# EAGLE board AgitPOV_WiFi_01 (EAGLE 7.4.0)
REV: A
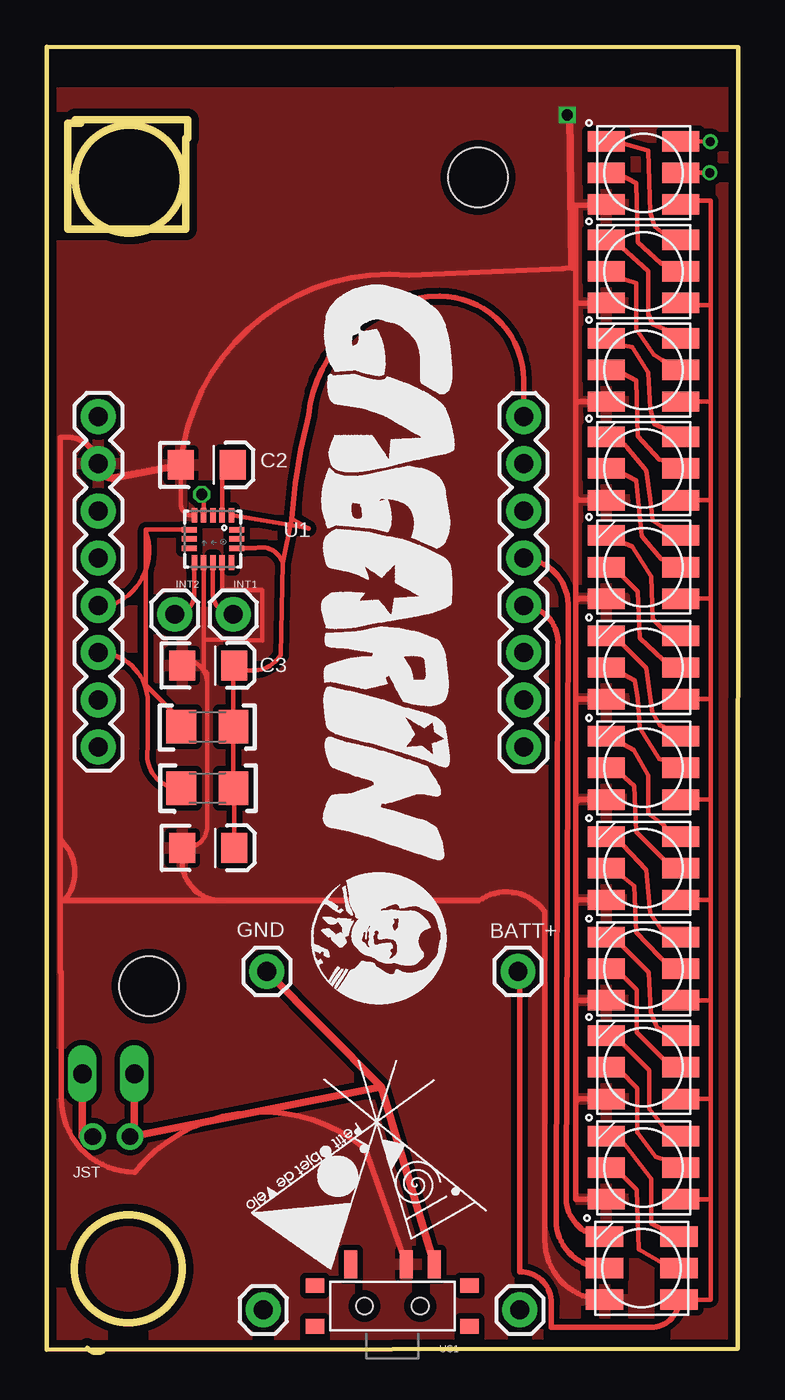
[diagram p0: board, top side]
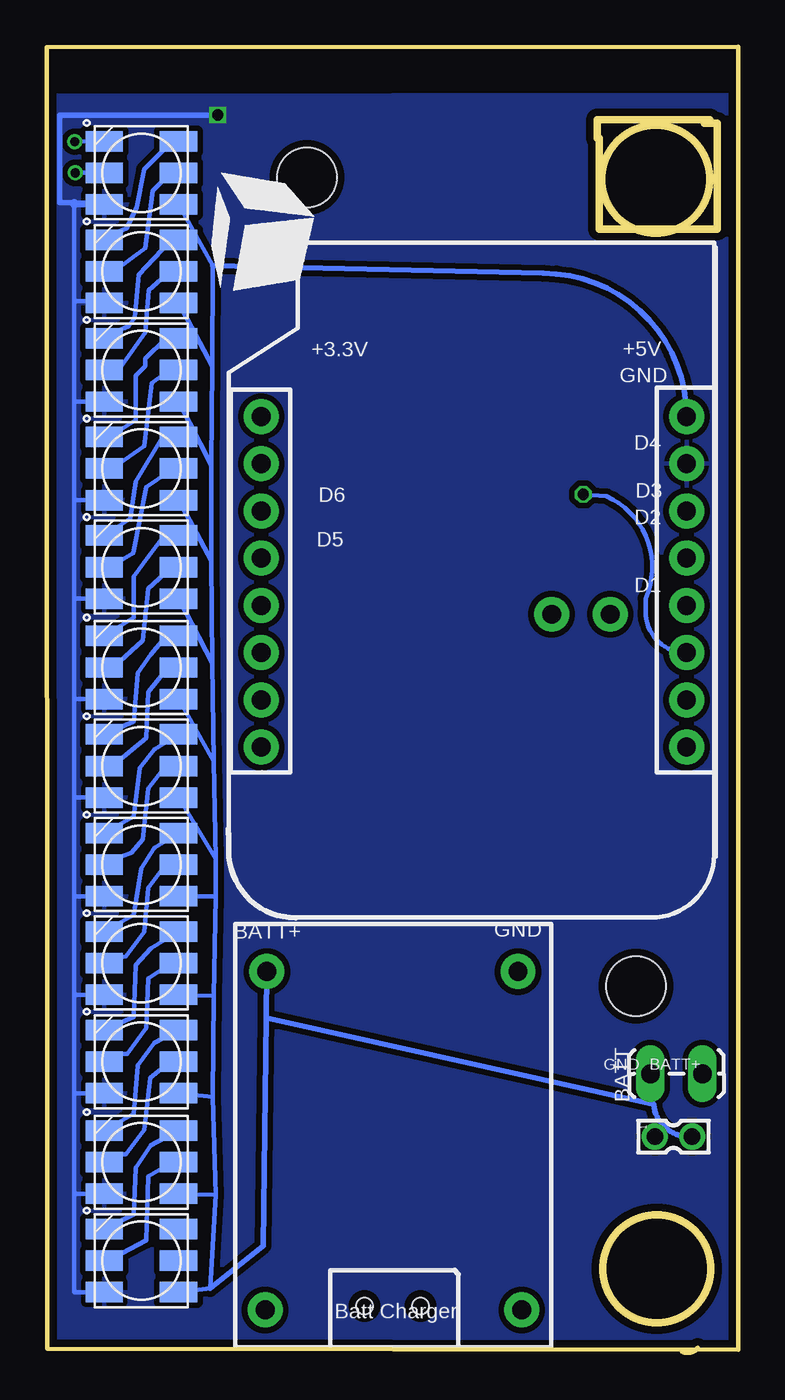
[diagram p1: board, bottom side, seen from below]

Size 37.2 x 70.27 mm. Coordinates in mm from the lower left corner, seen from the top.
Outline: 3.05,0.1 arc-90 2.19,0.29
Outline: 0,0.17 0,70.27 37.2,70.22 37.15,0.22 0,0.17
Outline: circle at 4.45,63.13 radius 2.88
Outline: circle at 4.4,4.53 radius 2.88
Copper layers (1*16): Top 0.035mm / dielectric 1.5mm / Bottom 0.035mm
Design rules "NOA Eagle Rule 2016-06-12": minimum track width 6mil, minimum drill 0.3mm, track to track 6mil, track to pad 6mil, pad to pad 6mil, via to via 6mil, smd to smd 0mil, copper to edge 0.4mm, drill to drill 10mil, minimum pad ring 10mil, minimum via ring 6mil, stop-mask expansion 2mil, vias tented up to drill 25mil, thermal gap 10mil
Holes 3.2 mm at 23.2,63.22 5.51,19.73

## Footprints (pad centres in the part's own frame; a part is rotated, then mirrored left to right if it is on the bottom)
1X02_LOCK_LONGPADS = drill 1.016 long: 1 -0.127,0; 2 2.667,0
1X01 = drill 1.016 pad 1.88: 1 0,0
EIA3216 = smd 1.4 x 1.6: A 1.4,0; C -1.4,0
APA102_5050 = smd 2 x 1.1: 1 2,-1.7; 2 2,0; 3 2,1.7; 4 -2,1.7; 5 -2,0; 6 -2,-1.7
332-02 = drill 0.9 pad 1.27: 1 0,-1; 2 0,1
1206 = smd 1.6 x 1.8: 1 -1.4,0; 2 1.4,0
QFN-16_0.5MM = smd 0.8 x 0.3: 1 -1.275,1; 2 -1.275,0.5; 3 -1.275,0; 4 -1.275,-0.5; 5 -1.275,-1; 9 1.275,-1; 10 1.275,-0.5; 11 1.275,0; 12 1.275,0.5; 13 1.275,1 | smd 0.3 x 0.8: 6 -0.5,-1.275; 7 0,-1.275; 8 0.5,-1.275; 14 0.5,1.275; 15 0,1.275; 16 -0.5,1.275
KPS-1290 = smd 0.7 x 1.5: O -2.25,2.25; P 0.75,2.25; S 2.25,2.25 | smd 1 x 0.8: P$1 -4.15,1.1; P$2 -4.15,-1.1; P$3 4.15,-1.1; P$4 4.15,1.1 | hole 0.9: -1.5,0; 1.5,0
1X08_ROUND = drill 1.016 pad 1.88: 1 0,0; 2 2.54,0; 3 5.08,0; 4 7.62,0; 5 10.16,0; 6 12.7,0; 7 15.24,0; 8 17.78,0

## Placement (x,y rotation side)
BATT  [1X02_LOCK_LONGPADS]  4.6,15.02 0 bottom
BATT+  [1X01]  25.35,20.52 0 top
C1  0.1uF  [EIA3216]  8.7,27.17 0 top
C2  0.1uF  [EIA3216]  8.62,47.76 0 top
C3  4.7uF  [EIA3216]  8.7,36.98 0 top
DEL1  APA1025050  [APA102_5050]  32,4.57 0 top
DEL2  APA1025050  [APA102_5050]  32.1,9.97 0 top
DEL3  APA1025050  [APA102_5050]  32.1,15.37 0 top
DEL4  APA1025050  [APA102_5050]  32.1,20.67 0 top
DEL5  APA1025050  [APA102_5050]  32.1,26.07 0 top
DEL6  APA1025050  [APA102_5050]  32.1,31.47 0 top
DEL7  APA1025050  [APA102_5050]  32.1,36.87 0 top
DEL8  APA1025050  [APA102_5050]  32.1,42.27 0 top
DEL9  APA1025050  [APA102_5050]  32.1,47.57 0 top
DEL10  APA1025050  [APA102_5050]  32.1,52.87 0 top
DEL11  APA1025050  [APA102_5050]  32.1,58.17 0 top
DEL12  APA1025050  [APA102_5050]  32.1,63.47 0 top
DEL13  APA1025050  [APA102_5050]  32.1,63.47 0 bottom
DEL15  APA1025050  [APA102_5050]  32.1,52.87 0 bottom
DEL16  APA1025050  [APA102_5050]  32.1,47.57 0 bottom
DEL17  APA1025050  [APA102_5050]  32.1,42.27 0 bottom
DEL18  APA1025050  [APA102_5050]  32.1,36.87 0 bottom
DEL19  APA1025050  [APA102_5050]  32.1,31.57 0 bottom
DEL20  APA1025050  [APA102_5050]  32.1,26.27 0 bottom
DEL21  APA1025050  [APA102_5050]  32.1,20.97 0 bottom
DEL22  APA1025050  [APA102_5050]  32.1,15.67 0 bottom
DEL23  APA1025050  [APA102_5050]  32.1,10.27 0 bottom
DEL24  APA1025050  [APA102_5050]  32.1,4.97 0 bottom
FFFFF  APA1025050  [APA102_5050]  32.1,58.17 0 bottom
GND  Batt Charger  [1X01]  11.85,20.52 0 top
INT1  [1X01]  10.05,39.73 0 top
INT2  [1X01]  6.9,39.73 0 top
JST  332-02  [332-02]  3.49,11.64 270 bottom
KK  [1X01]  11.65,2.32 0 top
PIN0  [1X01]  25.45,2.32 0 top
R1  4.7k  [1206]  8.65,33.68 0 top
R2  4.7k  [1206]  8.65,30.38 0 top
U1  MMA8452Q  [QFN-16_0.5MM]  8.95,43.78 270 top
U$1  SWITCH_SPDT  [KPS-1290]  18.6,2.53 0 top
WEMOS1  [1X08_ROUND]  25.65,32.59 90 top
WEMOS2  Wemos D1 mini  [1X08_ROUND]  2.79,50.37 270 top

## Library data of the parts
BATT BATT+ GND INT1 INT2 KK PIN0 WEMOS1 WEMOS2 = SparkFun-Connectors
C1-C3 = SparkFun-Capacitors; PROD_ID: CAP-00811
DEL1-DEL13 DEL15-DEL24 FFFFF = jos-ph
JST = con-garry
R1 R2 = SparkFun-Resistors
U1 = SparkFun-Sensors; PROD_ID: IC-10769
U$1 = SparkFun-Electromechanical; PROD_ID: SWCH-10651

## Nets
5V: BATT+.1 BATT.2 DEL1.1 DEL2.1 DEL3.1 DEL4.1 DEL5.1 DEL6.1 DEL7.1 DEL8.1 DEL9.1 DEL10.1 DEL11.1 DEL12.1 DEL13.1 DEL15.1 DEL16.1 DEL17.1 DEL18.1 DEL19.1 DEL20.1 DEL21.1 DEL22.1 DEL23.1 DEL24.1 FFFFF.1 JST.2 WEMOS2.1
+3.3V: C1.A C3.A R1.2 R2.2 U1.1 U1.14 WEMOS1.8
BYP: C2.A U1.2
ENTREEGND: BATT.1 GND.1 JST.1 U$1.S
GND: C1.C C2.C C3.C DEL1.6 DEL2.6 DEL3.6 DEL4.6 DEL5.6 DEL6.6 DEL7.6 DEL8.6 DEL9.6 DEL10.6 DEL11.6 DEL12.6 DEL13.6 DEL15.6 DEL16.6 DEL17.6 DEL18.6 DEL19.6 DEL20.6 DEL21.6 DEL22.6 DEL23.6 DEL24.6 FFFFF.6 U1.5 U1.10 U1.12 U$1.P WEMOS2.2
N$1: WEMOS1.7
N$2: DEL1.5 WEMOS1.4
N$4: DEL1.4 WEMOS1.5
N$8: DEL12.2 DEL13.5
N$12: DEL2.2 DEL3.5
N$14: DEL2.3 DEL3.4
N$15: DEL1.3 DEL2.4
N$16: DEL1.2 DEL2.5
N$17: DEL3.3 DEL4.4
N$18: DEL3.2 DEL4.5
N$19: DEL4.3 DEL5.4
N$20: DEL4.2 DEL5.5
N$21: DEL5.3 DEL6.4
N$22: DEL5.2 DEL6.5
N$23: DEL6.3 DEL7.4
N$24: DEL6.2 DEL7.5
N$25: DEL7.3 DEL8.4
N$26: DEL7.2 DEL8.5
N$27: DEL8.3 DEL9.4
N$28: DEL8.2 DEL9.5
N$29: DEL9.3 DEL10.4
N$30: DEL9.2 DEL10.5
N$31: DEL10.3 DEL11.4
N$32: DEL10.2 DEL11.5
N$33: DEL11.3 DEL12.4
N$34: DEL11.2 DEL12.5
N$41: WEMOS2.3
N$42: DEL12.3 DEL13.4
N$43: DEL15.5 FFFFF.2
N$44: DEL15.4 FFFFF.3
N$45: DEL13.3 FFFFF.4
N$46: DEL13.2 FFFFF.5
N$47: DEL15.3 DEL16.4
N$48: DEL15.2 DEL16.5
N$49: DEL16.3 DEL17.4
N$50: DEL16.2 DEL17.5
N$51: DEL17.3 DEL18.4
N$52: DEL17.2 DEL18.5
N$53: DEL18.3 DEL19.4
N$54: DEL18.2 DEL19.5
N$55: DEL19.3 DEL20.4
N$56: DEL19.2 DEL20.5
N$57: DEL20.3 DEL21.4
N$58: DEL20.2 DEL21.5
N$59: DEL21.3 DEL22.4
N$60: DEL21.2 DEL22.5
N$61: DEL22.3 DEL23.4
N$62: DEL22.2 DEL23.5
N$63: DEL23.3 DEL24.4
N$64: DEL23.2 DEL24.5
N$65: INT1.1 U1.11
N$67: INT2.1 U1.9
SCL: R2.1 U1.4 WEMOS2.6
SDA: R1.1 U1.6 WEMOS2.5

## Tracks (layer width: path | path; a pad name or v marks a point on that pad's centre or on a via)
5V
  Top 0.254: DEL1.1 35.7,2.87 35.7,8.27 | 35.7,8.27 35.7,13.67 | 35.7,13.67 35.7,18.97 | 35.7,18.97 35.7,24.37 | 35.7,24.37 35.7,29.77 | 35.7,29.77 35.7,35.17 | 35.7,35.17 35.7,40.57 | 35.7,40.57 35.7,45.87 | 35.7,45.87 35.7,51.17 | 35.7,51.17 35.7,56.37 | 35.7,56.37 35.7,61.97 34.1,61.97 DEL12.1 | DEL11.1 34.6,56.47 34.6,56.37 35.7,56.37 | DEL2.1 35.7,8.27 | DEL3.1 35.7,13.67 | DEL4.1 35.7,18.97 | DEL5.1 35.7,24.37 | DEL6.1 35.7,29.77 | DEL7.1 35.7,35.17 | DEL8.1 35.7,40.57 | DEL9.1 35.7,45.87 | DEL10.1 35.7,51.17
  Top 0.305: DEL1.1 arc-90 32.51,1.38 27.15,1.38 27.15,2.68 arc90 25.45,4.38 25.45,20.42 arc90 BATT+.1
  Top 0.406: JST.2 1.93,11.64 BATT.2
  Bottom 0.254: DEL13.1 28.25,58.47 28.3,53.07 | 28.3,53.07 28.35,47.77 | 28.35,47.77 28.35,42.62 | 28.35,42.62 28.3,37.12 | 28.3,37.12 28.2,31.82 | 28.2,31.82 28.1,26.57 | 28.1,26.57 28.1,24.57 | 28.1,24.57 28.2,19.22 | 28.2,19.22 28.25,13.77 | 28.25,13.77 28.1,8.52 | 28.1,8.52 28.4,3.47 DEL24.1 | FFFFF.1 28.3,53.07 | DEL15.1 28.35,47.77 | DEL16.1 28.35,42.62 | DEL17.1 28.3,37.12 | DEL18.1 28.2,31.82 | DEL19.1 28.1,26.57 | DEL20.1 28.1,24.57 | DEL21.1 28.2,19.22 | DEL22.1 28.25,13.77 | DEL23.1 28.1,8.52
  Bottom 0.305: 2.79,50.34 WEMOS2.1 arc-90 10.49,58.07 28.25,58.47 | 28.4,3.47 25.55,5.77 25.38,18.03 | 25.38,18.03 BATT+.1 | JST.2 arc90 4.55,13.38 25.38,18.03
+3.3V
  Top 0.254: C1.A 10.1,30.33 R2.2 R1.2 10.05,36.93 C3.A arc90 12.6,37.53 12.7,42.48 | 12.7,42.48 13.2,44.88 14.1,44.33 arc90 14.07,44.36 U1.1 | U1.14 11.25,43.28 arc-90 12.7,42.48
  Top 0.305: WEMOS1.8 25.65,52.33 arc90 21.15,56.83 arc84 14.1,50.43 arc11 13.2,44.88
BYP
  Top 0.254: C2.A 9.45,47.19 U1.2
ENTREEGND
  Top 0.406: GND.1 18,14.31 | 18,14.31 JST.1 4.73,11.64 BATT.1 | U$1.S 18,14.31
GND  (via drill 0.6)
  Top 0.254: C3.C 7.3,37.33 arc-90 8.65,35.98 | U1.5 arc-90 7.22,45.58 C2.C | 8.45,41.13 U1.10 8.45,38.38 | 8.65,35.98 8.65,28.33 arc-90 7.48,27.17 C1.C | 8.45,38.38 8.45,36.68 arc-90 8.65,36.48 8.65,35.98 | U1.12 9.45,41.03 11.6,41.03 11.6,38.33 8.45,38.38
  Top 0.305: 9.8,24.33 arc-90 7.3,26.18 C1.C | U$1.P 17.15,10.98 arc90 4.75,9.73 arc-90 0.8,13.68 0.8,20.48 arc-90 0.75,20.53 0.75,27.58 | DEL2.6 28.45,8.27 28.45,13.43 | 28.45,13.43 28.45,19.03 | 28.45,19.03 28.45,24.18 | 28.45,24.18 28.45,29.48 | 28.45,29.48 28.45,35.18 | 28.45,35.18 28.45,40.33 | 28.45,40.33 28.45,46.13 | 28.45,46.13 28.45,50.98 | 28.45,50.98 28.45,56.38 | 28.45,56.38 28.45,61.73 | 28.45,61.73 28.23,58.39 27.75,58.33 19.49,57.98 arc90 C2.C | 28.45,61.73 30.06,61.73 arc90 DEL12.6 | DEL11.6 28.53,56.47 arc90 28.45,56.38 | DEL10.6 28.63,51.17 arc90 28.45,50.98 | DEL9.6 28.71,45.87 arc-90 28.45,46.13 | DEL8.6 28.68,40.57 arc90 28.45,40.33 | DEL7.6 28.46,35.17 arc-90 28.45,35.18 | DEL6.6 28.73,29.77 arc90 28.45,29.48 | DEL5.6 28.63,24.37 arc90 28.45,24.18 | DEL4.6 28.51,18.97 arc-90 28.45,19.03 | DEL3.6 28.68,13.67 arc90 28.45,13.43 | DEL1.6 arc-90 26.8,6.07 26.8,23.73 arc90 23.25,24.33 9.8,24.33 | 0.75,27.58 0.75,49.23 arc-90 WEMOS2.2 | 9.8,24.33 0.95,24.33 arc90 0.75,27.58
  Top 0.406: C2.C 3.55,47.06 arc-90 WEMOS2.2 | v28,66.58 28.13,66.58 28.23,58.39
  Bottom 0.254: DEL24.6 35.7,3.27 35.7,8.57 | 35.7,8.57 35.7,13.97 | 35.7,13.97 35.7,19.27 | 35.7,19.27 35.7,24.57 | 35.7,24.57 35.7,29.87 | 35.7,29.87 35.7,35.17 | 35.7,35.17 35.7,40.57 | 35.7,40.57 35.7,45.87 | 35.7,45.87 35.7,51.17 | 35.7,51.17 35.7,56.57 | 35.7,61.77 35.7,61.87 34.7,61.87 34.7,61.77 | 35.68,61.77 35.7,61.77 | 35.7,61.77 35.7,56.57 | 35.7,56.57 34.8,56.57 | 34.8,56.57 34.8,56.47 34.7,56.47 34.7,56.27 | DEL15.6 35.7,51.17 | DEL16.6 35.7,45.87 | DEL17.6 35.7,40.57 | DEL18.6 35.7,35.17 | DEL19.6 35.7,29.87 | DEL20.6 35.7,24.57 | DEL21.6 35.7,19.27 | DEL22.6 35.7,13.97 | DEL23.6 35.7,8.57 | FFFFF.6 34.23,56.57 34.69,56.57 34.8,56.57
  Bottom 0.305: DEL13.6 35.68,61.77 | v28,66.58 36.5,66.58 36.5,61.88 35.7,61.88
  Bottom 0.406: 35.7,61.88 35.7,61.77
  pour Top (isolate 0.305): 0.05,67.77 37.4,67.82 37.1,0.27 0,0.17 0,65.57
  pour Bottom (isolate 0.305): -0.1,67.67 37.35,67.62 37.4,58.47 37.3,0.17 0.2,0.17 -0.2,65.47
N$2
  Top 0.305: DEL1.5 arc-90 27.4,7.17 27.5,38.06 arc90 WEMOS1.4
N$4
  Top 0.305: DEL1.4 arc-90 27.95,8.32 28.05,40.05 arc90 WEMOS1.5
N$8  (via drill 0.5 pad 0.25)
  Top 0.254: v35.66,63.47 DEL12.2
  Bottom 0.254: DEL12.2 v35.66,63.47
N$12
  Top 0.254: DEL3.5 30.13,15.19 30.81,15.19 31.75,14.25 31.75,11.86 32.76,10.56 34.01,10.16 DEL2.2
N$14
  Top 0.254: DEL2.3 34.01,11.76 33.9,11.67 33.57,11.67 32.41,13.13 32.41,15.19 30.58,17.02 30.13,17.02 DEL3.4
N$15
  Top 0.254: DEL1.3 33.8,6.27 32.5,6.97 32.5,9.37 30.9,11.47 30.3,11.47 DEL2.4
N$16
  Top 0.254: DEL2.5 30.13,9.93 30.58,9.93 31.74,8.77 31.84,5.59 33.78,4.45 DEL1.2
N$17
  Top 0.254: DEL3.3 34.01,17.25 33.63,17.03 32.8,17.53 32.48,18.35 32.38,20.48 30.58,22.28 30.13,22.28 DEL4.4
N$18
  Top 0.254: DEL4.5 30.13,20.45 30.81,20.45 31.73,19.53 31.73,17.25 33.56,15.42 DEL3.2
  Top 0.305: DEL3.2 33.6,15.37
N$19
  Top 0.254: DEL4.3 34.01,22.5 33.6,22.22 33.37,22.32 32.45,23.63 32.25,25.99 30.58,27.76 30.13,27.76 DEL5.4
N$20
  Top 0.254: DEL4.2 34.01,20.68 33.56,20.68 31.7,22.63 31.6,25.12 30.58,25.93 30.13,25.93 DEL5.5
N$21
  Top 0.254: DEL5.3 34.01,27.99 33.33,27.98 33.2,28.38 32.35,29.02 32.35,31.05 31.58,32.42 31.03,32.72 DEL6.4
N$22
  Top 0.254: DEL5.2 34.01,26.16 33.56,26.16 31.7,28.02 31.6,30.51 30.58,31.42 30.13,31.42 DEL6.5
N$23
  Top 0.254: DEL6.3 34.01,33.25 33.6,33.46 32.97,33.76 32.55,34.48 32.25,36.84 30.58,38.51 30.13,38.51 DEL7.4
N$24
  Top 0.254: DEL6.2 34.01,31.65 32.96,31.95 31.9,33.61 31.8,35.19 31.61,36.18 31.03,36.48 DEL7.5
N$25
  Top 0.254: DEL7.3 33.5,38.57 32.6,39.47 32.5,41.77 31.5,43.37 DEL8.4
N$26
  Top 0.254: DEL7.2 34.01,36.91 33.56,36.91 31.9,38.46 31.8,40.95 30.38,42.36 29.93,42.36 DEL8.5
N$27
  Top 0.254: DEL8.3 33.81,44.19 33.03,44.48 32.6,44.78 32.45,45.92 32.25,47.45 31.18,48.72 31.13,48.82 DEL9.4
N$28
  Top 0.254: DEL8.2 33.81,42.59 33.06,42.69 32,43.95 31.7,46.91 30.38,47.62 29.93,47.62 DEL9.5
N$29
  Top 0.254: DEL9.3 33.81,49.45 33.6,49.57 32.67,49.97 32.45,50.78 32.35,52.74 31.48,54.11 30.93,54.21 DEL10.4
N$30
  Top 0.254: DEL9.2 33.81,47.85 32.96,48.05 31.8,49.31 31.7,52.29 30.61,52.88 29.93,52.88 DEL10.5
N$31
  Top 0.254: DEL10.3 33.81,54.94 33.53,54.92 32.6,55.32 32.35,55.87 32.35,58.19 30.38,59.97 29.93,59.97 DEL11.4
N$32
  Top 0.254: DEL10.2 33.11,53.41 32.66,53.71 31.7,55.07 31.7,57.55 30.68,57.87 29.93,58.37 DEL11.5
N$33
  Top 0.254: DEL11.3 33.81,60.2 33.33,60.08 32.7,60.58 32.45,61.32 32.35,64.65 30.38,65.22 29.93,65.22 DEL12.4
N$34
  Top 0.254: DEL11.2 33.81,58.59 33.06,58.59 31.8,59.75 31.7,62.91 30.38,63.62 29.93,63.62 DEL12.5
N$42  (via drill 0.5 pad 0.25)
  Top 0.254: DEL12.3 v35.68,65.14
  Bottom 0.254: v35.68,65.14 DEL12.3
N$43
  Bottom 0.254: DEL15.5 33.2,53.02 33.15,53.12 31.89,54.87 31.69,57.16 30.8,57.95 30.12,57.95 FFFFF.2
N$44
  Bottom 0.254: DEL15.4 34,54.75 33.02,55.13 32.79,55.23 32.45,55.67 32.25,58 30.58,59.77 30.12,59.77 FFFFF.3
N$45
  Bottom 0.254: FFFFF.4 34,60 33.12,60.39 32.89,60.49 32.35,61.63 31.95,63.66 30.58,65.03 30.12,65.03 DEL13.3
N$46
  Bottom 0.254: FFFFF.5 34,58.17 33.55,58.17 31.89,59.43 31.49,62.52 30.58,63.43 30.12,63.43 DEL13.2
N$47
  Bottom 0.254: DEL15.3 30.8,54.57 31.9,53.47 31.9,53.07 32.4,52.57 32.4,50.17 33.96,49.19 | 33.96,49.19 34,49.17 | DEL16.4 34,49.26 33.96,49.19
N$48
  Bottom 0.254: DEL15.2 30.12,52.69 30.8,52.69 31.53,52.16 31.93,48.77 33.55,47.66 34,47.66 DEL16.5
N$49
  Bottom 0.254: DEL17.4 32.7,44.87 32.4,46.87 30.9,49.37 30.84,49.24 | 30.84,49.24 30.7,48.97 | DEL16.3 30.12,49.26 30.8,49.26 30.84,49.24
N$50
  Bottom 0.254: DEL16.2 30.12,47.43 30.58,47.43 31.83,46.57 32.53,43.02 33.55,42.4 34,42.4 DEL17.5
N$51
  Bottom 0.254: DEL18.4 32.5,39.57 32.5,41.77 31.7,42.87 30.7,44.17 DEL17.3
N$52
  Bottom 0.254: DEL17.2 30.12,42.17 30.58,42.17 31.73,41.12 32.03,38.33 33.55,36.91 34,36.91 DEL18.5
N$53
  Bottom 0.254: DEL19.4 32.5,33.97 32.3,36.57 31.6,37.57 31,38.27 DEL18.3
N$54
  Bottom 0.254: DEL18.2 30.12,36.69 30.8,36.69 31.73,35.56 31.83,33.07 33.55,31.66 34,31.66 DEL19.5
N$55
  Bottom 0.254: DEL20.4 32.5,28.87 32.2,31.47 31.4,32.47 DEL19.3
N$56
  Bottom 0.254: DEL19.2 30.12,31.43 30.98,31.33 31.73,30.37 32.03,27.61 32.65,26.9 34,26.4 DEL20.5
N$57
  Bottom 0.254: DEL21.4 32.5,23.57 32.1,26.07 31.4,27.17 DEL20.3
N$58
  Bottom 0.254: DEL20.2 30.12,26.17 30.88,26.17 31.73,25.01 31.93,22.66 32.95,21.34 34,21.14 DEL21.5
N$59
  Bottom 0.254: DEL22.4 32.5,18.07 32.4,20.87 31.6,21.77 DEL21.3
N$60
  Bottom 0.254: DEL21.2 30.12,20.91 30.58,20.91 31.73,20.16 31.83,17.5 32.85,16.08 33.3,16.08 DEL22.5
N$61
  Bottom 0.254: DEL23.4 32.5,12.87 32.3,15.47 31.4,16.67 DEL22.3
N$62
  Bottom 0.254: DEL22.2 30.12,15.66 30.58,15.66 31.63,14.8 31.93,12.01 32.95,10.7 33.4,10.7 DEL23.5
N$63
  Bottom 0.254: DEL24.4 32.5,7.47 32.4,9.97 31.6,11.17 DEL23.3
N$64
  Bottom 0.254: DEL23.2 30.12,10.17 30.58,10.17 31.73,9.51 31.83,6.05 33.55,5.14 34,5.14 DEL24.5
N$65
  Top 0.254: U1.11 8.95,40.83 arc90 INT1.1
N$67
  Top 0.254: U1.9 7.95,40.78 arc-90 INT2.1
SCL  (via drill 0.6)
  Top 0.254: R2.1 6.89,30.38 arc-90 5.45,32.48 5.45,35.01 arc90 WEMOS2.6 | U1.4 8.45,46.08 arc90 v8.35,46.18
  Bottom 0.254: v8.35,46.18 7.1,46.08 arc90 5,40.58 5,39.87 arc-90 WEMOS2.6
SDA
  Top 0.254: R1.1 7.25,34.03 5.35,35.93 5.35,44.18 | 5.35,44.18 5.35,44.28 U1.6 | WEMOS2.5 3.42,40.21 arc90 5.35,44.18

## Text on the board
bNames: +5V | +3.3V | GND | D4 | D3 | D6 | D2 | D5 | D1 | GND | BATT+ | GND | BATT+
tValues: R3 | R2 | C1
uqam: v0.2
noms_b: V+ | 3V3 | G | D4 | D7 | D2 | A0
192bmp: /Users/uqam/Desktop/ohanda_logo.bmp
noms_t: G | DHT11 | D7 | SPKR | 3V | A0 | D2 | G | DEL | V+ | D2 | A0 | D4 | D7 | G | G | V+ | 3V3 | V+ | MQ-7 | V+ | PWR | G
225bmp: /Users/uqam/Documents/AgitPOV_WiFi/logo_texte_gagarin.bmp